# Altium PCB lab1_shkabara_usb_rs232.PcbDoc
Units mm, origin at the board's own origin, x right, y up, seen from the top; angles counter-clockwise.
Board outline 78 x 33.8 mm, 4 copper layers (Top Layer, Signal Layer 1, Signal Layer 2, Bottom Layer), stack 1.522 mm thick; 28 components, 25 nets, 125 pads, 38 vias.
Unrouted connection lines stored in the file: 11.
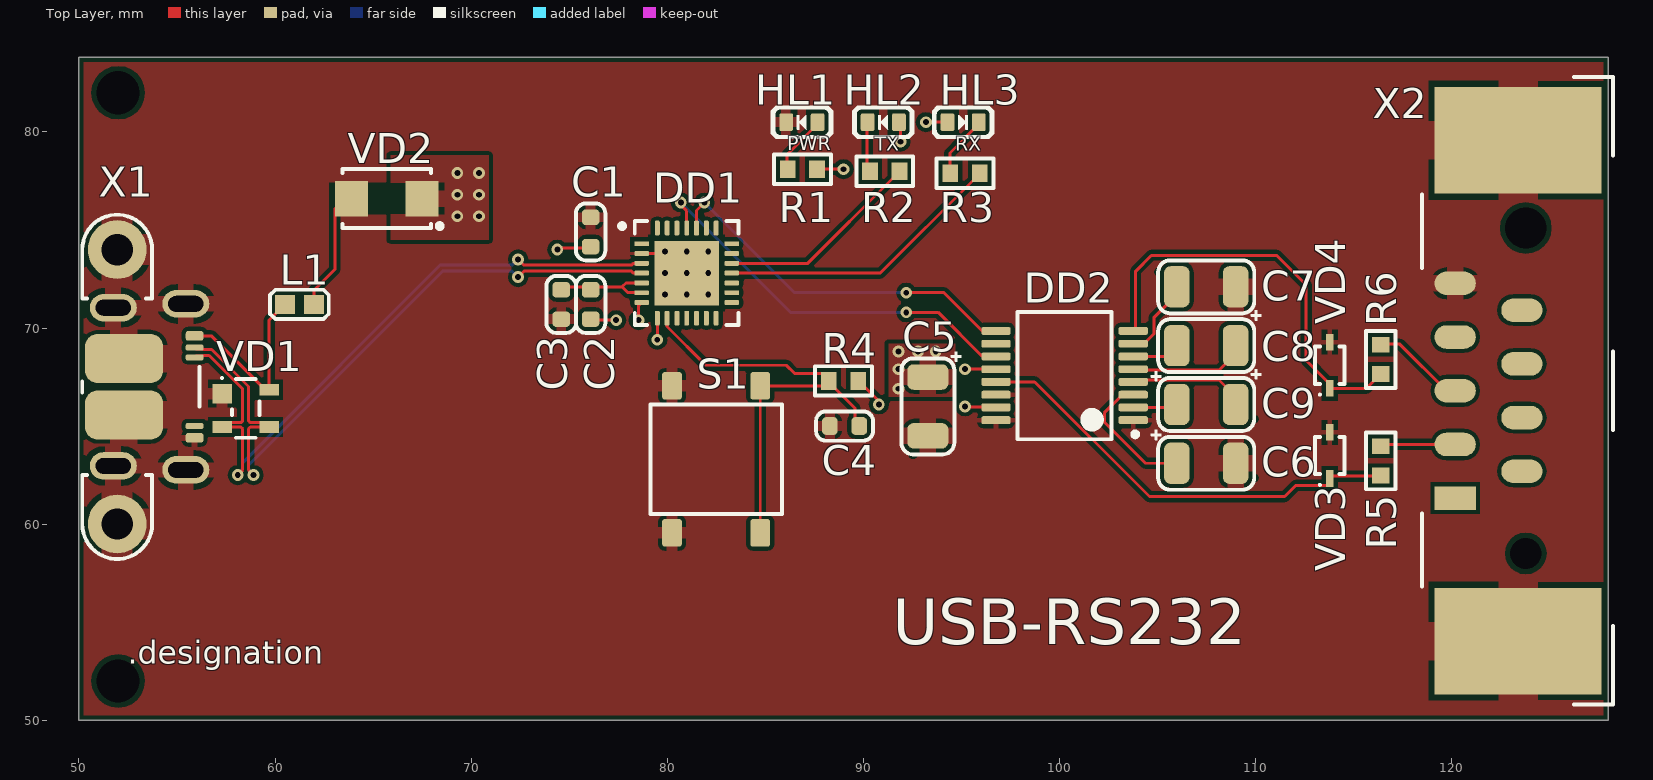
[diagram p0: Top Layer view]
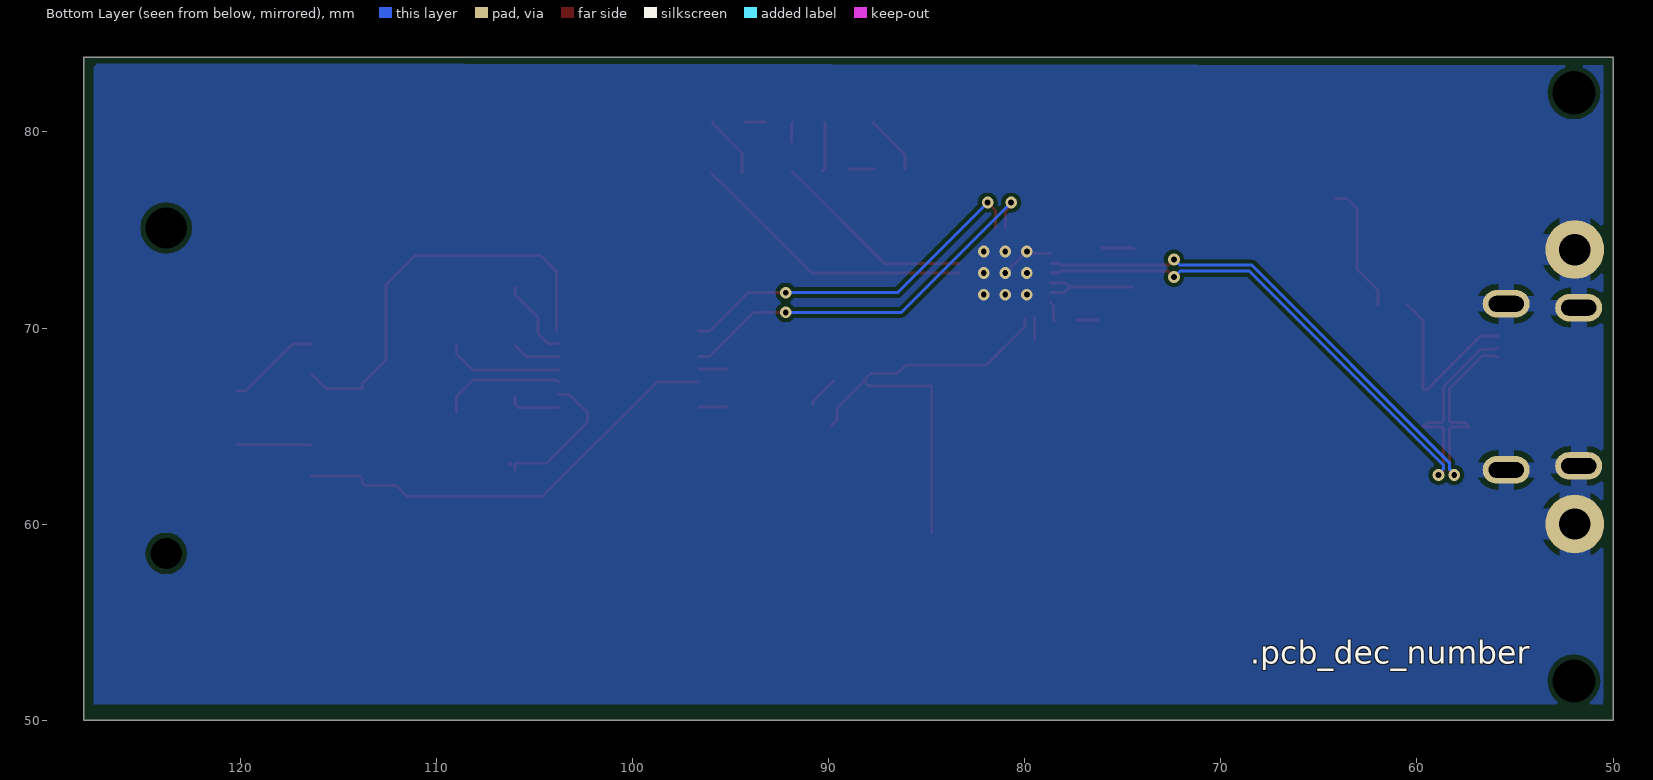
[diagram p1: Bottom Layer view, seen from below]
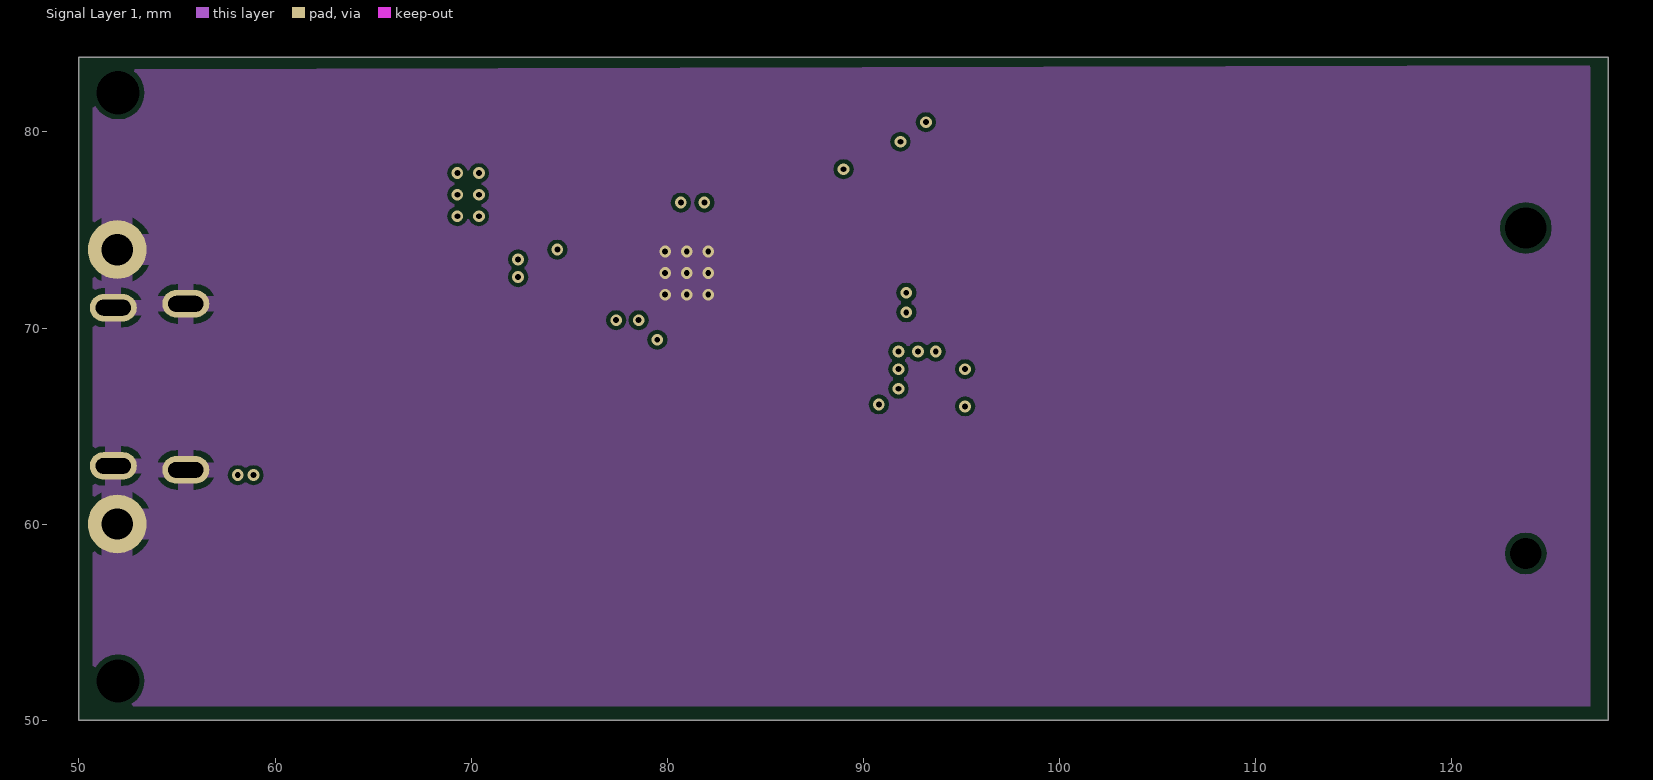
[diagram p2: Signal Layer 1]
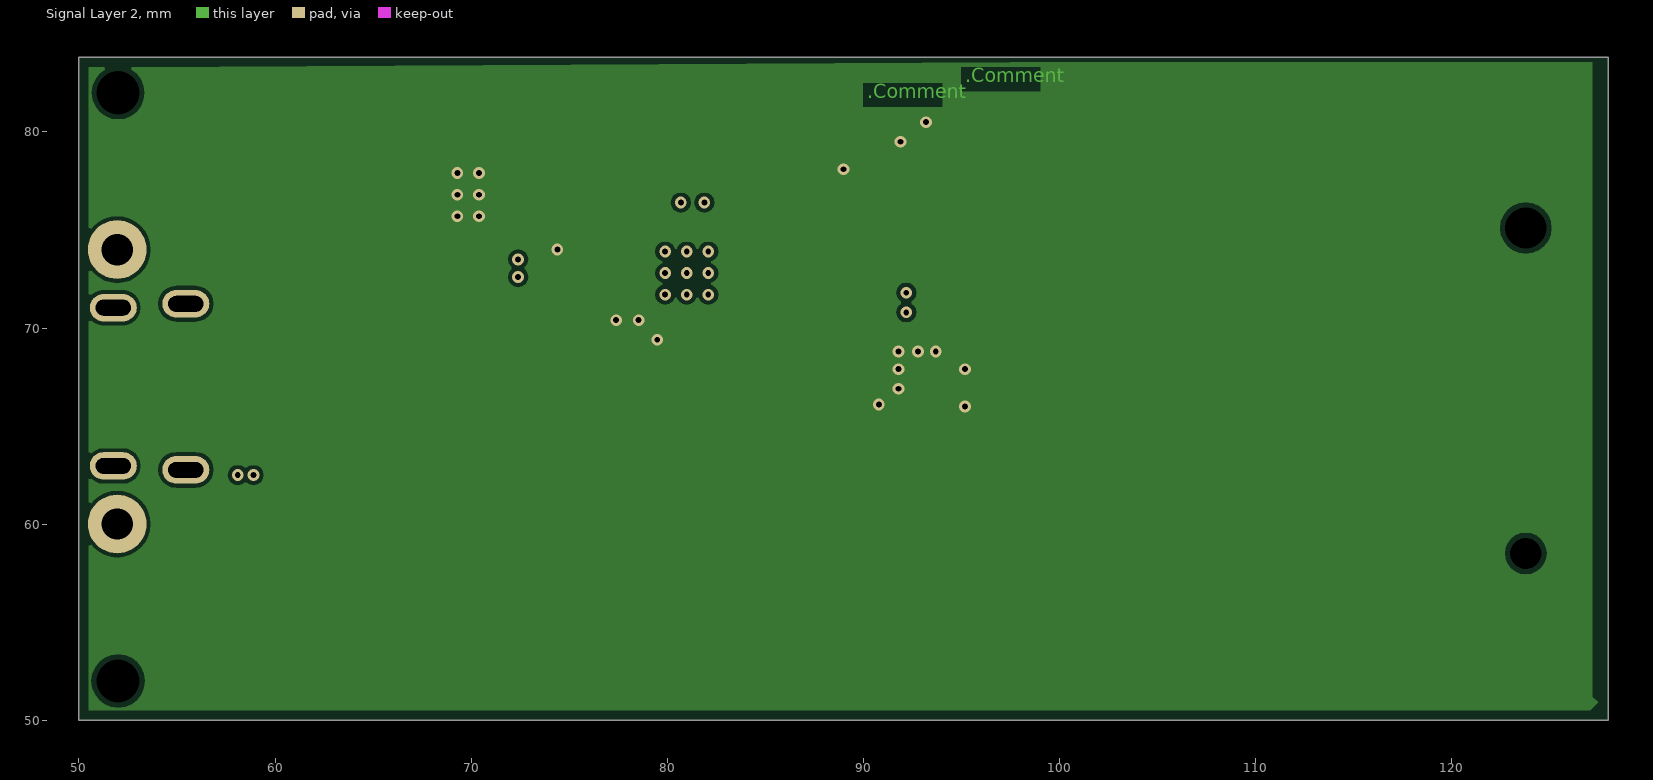
[diagram p3: Signal Layer 2]
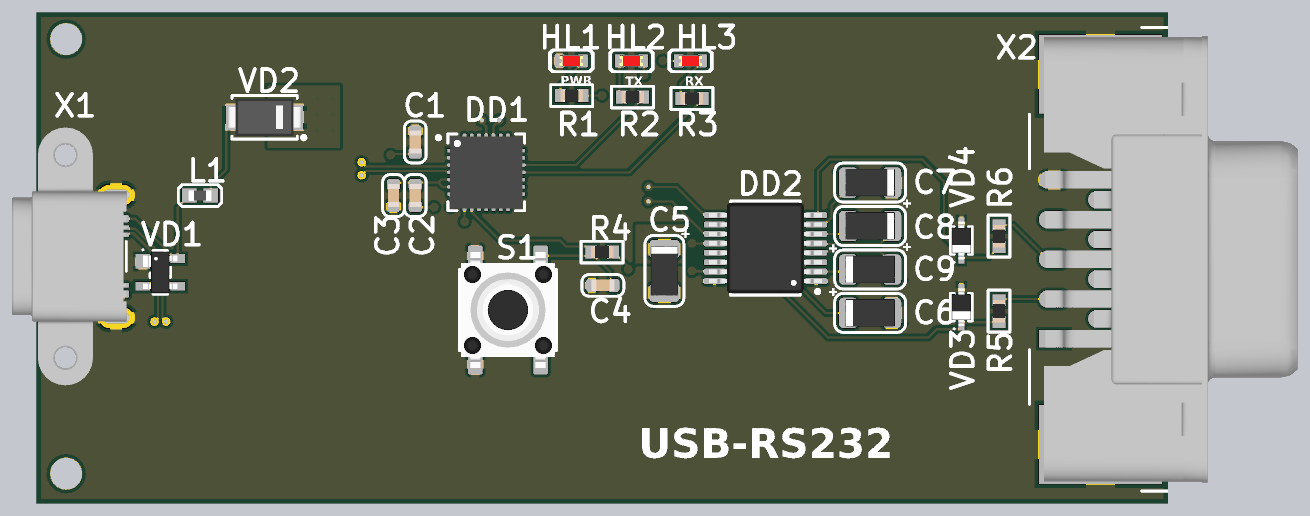
[diagram p4: 3D render of the assembled board from above, using the file's embedded part models]

## Layer stack, top to bottom
Top Solder: solder mask 0.0102, Solder Resist, Dk 3.5
Top Layer: signal copper 0.018
Prepreg 1: prepreg 0.125, FR4 HiTg170, Dk 5.07
Signal Layer 1: signal copper 0.018
Core 1: core 1.2, FR4, Dk 4.6
Signal Layer 2: signal copper 0.018
Prepreg 2: prepreg 0.125, FR4 HiTg170, Dk 5.07
Bottom Layer: signal copper 0.018
Bottom Solder: solder mask 0.0102, Solder Resist, Dk 3.5

## Board outline
50,50 128,50 128,83.8 50,83.8

## Design rules (kind name [scope] priority, off if disabled: settings)
AcuteAngle min_acute_angle [OnCopper] p1: minimum=3.50000000000000E+0001 checktracksonly=FALSE // Минимальный угол между примитивами топологии
BoardOutlineClearance board_outline_clearance_std [NOT (OnLayer('Bottom Overlay') OR OnLayer('Top Overlay'))] p1: gap=0.25 ignorepadtopadclearanceinfootprint=FALSE except(0: Arc-SplitContinuation Track-SplitContinuation SMDPad-SplitContinuation THPad-SplitContinuation Via-SplitContinuation Fill-SplitContinuation Poly-SplitContinuation Region-SplitContinuation Text-SplitContinuation) // Отступ элементов топологии от края фрезеруемой печатной платы
Clearance "Stitching GND" [IsStitchingVia and InNet('GND') vs (IsVia and (Not IsStitchingVia)) Or IsPad] p1: gap=0.127 ignorepadtopadclearanceinfootprint=FALSE
Clearance clearance_outer_18um_std [OnTopLayer OR OnBottomLayer] p2: gap=0.125 ignorepadtopadclearanceinfootprint=TRUE except(0.2: Arc-Fill Arc-Poly Track-Fill Track-Poly SMDPad-SMDPad SMDPad-Fill SMDPad-Poly THPad-Fill THPad-Poly Via-Fill Via-Poly Fill-Fill Fill-Poly Poly-Poly Poly-Region Poly-Text; 0.25: Arc-Hole Track-Hole SMDPad-Hole THPad-Hole Via-Hole Fill-Hole Poly-Hole Region-Hole Text-Hole) // Зазоры на внешних слоях
Clearance clearance_inner_18um_std [NOT (OnTopLayer Or OnBottomLayer)] p3: gap=0.125 ignorepadtopadclearanceinfootprint=FALSE except(0.2: Arc-Fill Arc-Poly Track-Fill Track-Poly SMDPad-SMDPad SMDPad-Fill SMDPad-Poly THPad-Fill THPad-Poly Via-Fill Via-Poly Fill-Fill Fill-Poly Poly-Poly Poly-Region Poly-Text; 0.25: Arc-Hole Track-Hole SMDPad-Hole THPad-Hole Via-Hole Fill-Hole Poly-Hole Region-Hole Text-Hole) // Зазоры на внутренних слоях
ComponentClearance [All] p1: gap=0 collisioncheckmode=3 verticalgap=0 showdistances=FALSE
DiffPairsRouting "Schematic Differential Pairs Routing_1" [InNet('USB_D_P')] p1: maxlimit=0.254 minlimit=0.15 mostfreqgap=0.254 toplayer_maxgap=0.15 toplayer_prefgap=0.15 toplayer_minwidth=0.155 toplayer_maxwidth=0.155 toplayer_prefwidth=0.155 bottomlayer_maxgap=0.15 bottomlayer_prefgap=0.15 bottomlayer_minwidth=0.155 bottomlayer_maxwidth=0.155 bottomlayer_prefwidth=0.155 impedanceprofiledriven=TRUE impedanceprofileid={1B1F1868-2FFB-4D51-908A-913D90CA9AFC} impedanceprofilevalue=95.000000 maxuncoupledlength=12.7
DiffPairsRouting "Schematic Differential Pairs Routing" [InNet('USB_D_N')] p2: maxlimit=0.254 minlimit=0.15 mostfreqgap=0.254 toplayer_maxgap=0.15 toplayer_prefgap=0.15 toplayer_minwidth=0.155 toplayer_maxwidth=0.155 toplayer_prefwidth=0.155 bottomlayer_maxgap=0.15 bottomlayer_prefgap=0.15 bottomlayer_minwidth=0.155 bottomlayer_maxwidth=0.155 bottomlayer_prefwidth=0.155 impedanceprofiledriven=TRUE impedanceprofileid={1B1F1868-2FFB-4D51-908A-913D90CA9AFC} impedanceprofilevalue=95.000000 maxuncoupledlength=12.7
DiffPairsRouting diff_pairs_routing [All] p3: maxlimit=0.254 minlimit=0.127 mostfreqgap=0.254 toplayer_maxgap=0.127 toplayer_prefgap=0.127 toplayer_minwidth=0.143 toplayer_maxwidth=0.143 toplayer_prefwidth=0.143 midlayer1_minwidth=0.381 midlayer1_maxwidth=0.381 midlayer1_prefwidth=0.381 midlayer2_minwidth=0.381 midlayer2_maxwidth=0.381 midlayer2_prefwidth=0.381 bottomlayer_maxgap=0.127 bottomlayer_prefgap=0.127 bottomlayer_minwidth=0.143 bottomlayer_maxwidth=0.143 bottomlayer_prefwidth=0.143 impedanceprofiledriven=TRUE maxuncoupledlength=12.7 // Правила трассировки дифференциальных пар
HoleSize min_hole_size_std [IsPad] p1: absolutevalues=TRUE maxlimit=5.9 minlimit=0.6 maxpercent=80.000 minpercent=20.000 // Диаметр межслойного переходного отверстия
HoleSize min_hole_size_via_std [IsVia] p2: absolutevalues=TRUE maxlimit=5.9 minlimit=0.3 maxpercent=80.000 minpercent=20.000 // Минимальный диаметр монтажного отверстия
HoleToHoleClearance hole_to_hole_clearance_std [All] p1: gap=0.2 allowstackedmicrovias=FALSE // Минимальное расстояние между краями двух отверстий
MinimumAnnularRing min_via_ar_std [All] p1: minimumring=0.15 // Поясок площадки переходного отверстия (Annular ring VIA)
MinimumAnnularRing min_pad_ar_std [All] p2: minimumring=0.2 // Поясок монтажной контактной площадки (Annular ring PAD)
MinimumSolderMaskSliver min_solder_mask_bridge_std [All] p1: minsoldermaskwidth=0.15 // Мнимальная ширина масочного мостика
PlaneClearance plane_clearance_18um_std [All] p1: clearance=0.2 // Отступ полигона (для слоя plane) от элементов топологии
PlaneConnect [All] p1: planeconnectstyle=Relief reliefexpansion=0.5 reliefentries=4 reliefconductorwidth=0.2 reliefairgap=0.2
PolygonConnect poly_connect_to_pad<=0.3 [(AsMM(PadXSize_AllLayers)<=0.301) or (AsMM(PadYSize_AllLayers)<=0.301)] p1: thpad.connectstyle=Relief thpad.reliefconductorwidth=0.2 thpad.reliefentries=4 thpad.polygonreliefangle="90 Angle" thpad.airgapwidth=0.2 smdpad.connectstyle=Relief smdpad.reliefconductorwidth=0.2 smdpad.reliefentries=4 smdpad.polygonreliefangle="90 Angle" smdpad.airgapwidth=0.2 via.connectstyle=Direct via.reliefconductorwidth=0.254 via.reliefentries=4 via.polygonreliefangle="90 Angle" via.airgapwidth=0.254 // Правила подключения полигонов для падов от 0,3мм и меньше
PolygonConnect poly_connect_to_pad<=0.4 [(AsMM(PadXSize_AllLayers)<=0.401) or (AsMM(PadYSize_AllLayers)<=0.401)] p2: thpad.connectstyle=Relief thpad.reliefconductorwidth=0.26 thpad.reliefentries=4 thpad.polygonreliefangle="90 Angle" thpad.airgapwidth=0.2 smdpad.connectstyle=Relief smdpad.reliefconductorwidth=0.26 smdpad.reliefentries=4 smdpad.polygonreliefangle="90 Angle" smdpad.airgapwidth=0.2 via.connectstyle=Direct via.reliefconductorwidth=0.254 via.reliefentries=4 via.polygonreliefangle="90 Angle" via.airgapwidth=0.254 // Правила подключения полигонов для падов от 0,4 и меньше
PolygonConnect poly_connect_to_pad<=0.6 [(AsMM(PadXSize_AllLayers)<=0.601) or (AsMM(PadYSize_AllLayers)<=0.601)] p3: thpad.connectstyle=Relief thpad.reliefconductorwidth=0.33 thpad.reliefentries=4 thpad.polygonreliefangle="90 Angle" thpad.airgapwidth=0.2 smdpad.connectstyle=Relief smdpad.reliefconductorwidth=0.33 smdpad.reliefentries=4 smdpad.polygonreliefangle="90 Angle" smdpad.airgapwidth=0.2 via.connectstyle=Direct via.reliefconductorwidth=0.254 via.reliefentries=4 via.polygonreliefangle="90 Angle" via.airgapwidth=0.254 // Правила подключения полигонов для падов от 0,6мм и меньше
PolygonConnect poly_connect_to_pad<=0.7 [(AsMM(PadXSize_AllLayers)<=0.701) or (AsMM(PadYSize_AllLayers)<=0.701)] p4: thpad.connectstyle=Relief thpad.reliefconductorwidth=0.46 thpad.reliefentries=4 thpad.polygonreliefangle="90 Angle" thpad.airgapwidth=0.2 smdpad.connectstyle=Relief smdpad.reliefconductorwidth=0.46 smdpad.reliefentries=4 smdpad.polygonreliefangle="90 Angle" smdpad.airgapwidth=0.2 via.connectstyle=Direct via.reliefconductorwidth=0.254 via.reliefentries=4 via.polygonreliefangle="90 Angle" via.airgapwidth=0.254 // Правила подключения полигонов для падов от 0,7мм и меньше
PolygonConnect poly_connect_to_pad<=0.8 [(AsMM(PadXSize_AllLayers)<=0.8)or(AsMM(PadYSize_AllLayers)<=0.8)] p5: thpad.connectstyle=Relief thpad.reliefconductorwidth=0.53 thpad.reliefentries=4 thpad.polygonreliefangle="90 Angle" thpad.airgapwidth=0.3 smdpad.connectstyle=Relief smdpad.reliefconductorwidth=0.53 smdpad.reliefentries=4 smdpad.polygonreliefangle="90 Angle" smdpad.airgapwidth=0.2 via.connectstyle=Direct via.reliefconductorwidth=0.254 via.reliefentries=4 via.polygonreliefangle="90 Angle" via.airgapwidth=0.254 // Правила подключения полигонов для падов от 0,8мм и меньше
PolygonConnect poly_connect_to_pad<=1 [(AsMM(PadXSize_AllLayers)<=1.01)or(AsMM(PadYSize_AllLayers)<=1.01)] p6: thpad.connectstyle=Relief thpad.reliefconductorwidth=0.6 thpad.reliefentries=4 thpad.polygonreliefangle="90 Angle" thpad.airgapwidth=0.3 smdpad.connectstyle=Relief smdpad.reliefconductorwidth=0.6 smdpad.reliefentries=4 smdpad.polygonreliefangle="90 Angle" smdpad.airgapwidth=0.2 via.connectstyle=Direct via.reliefconductorwidth=0.254 via.reliefentries=4 via.polygonreliefangle="90 Angle" via.airgapwidth=0.254 // Правила подключения полигонов для падов от 1мм и меньше
PolygonConnect poly_connect_to_pad<=1.3 [(AsMM(PadXSize_AllLayers)<=1.31)or(AsMM(PadYSize_AllLayers)<=1.31)] p7: thpad.connectstyle=Relief thpad.reliefconductorwidth=0.66 thpad.reliefentries=4 thpad.polygonreliefangle="90 Angle" thpad.airgapwidth=0.3 smdpad.connectstyle=Relief smdpad.reliefconductorwidth=0.86 smdpad.reliefentries=4 smdpad.polygonreliefangle="90 Angle" smdpad.airgapwidth=0.2 via.connectstyle=Direct via.reliefconductorwidth=0.254 via.reliefentries=4 via.polygonreliefangle="90 Angle" via.airgapwidth=0.254 // Правила подключения полигонов для падов от 1,3мм и меньше
PolygonConnect poly_connect_to_pad<=1.6 [(AsMM(PadXSize_AllLayers)<=1.61)or(AsMM(PadYSize_AllLayers)<=1.61)] p8: thpad.connectstyle=Relief thpad.reliefconductorwidth=0.8 thpad.reliefentries=4 thpad.polygonreliefangle="90 Angle" thpad.airgapwidth=0.3 smdpad.connectstyle=Relief smdpad.reliefconductorwidth=1 smdpad.reliefentries=4 smdpad.polygonreliefangle="90 Angle" smdpad.airgapwidth=0.2 via.connectstyle=Direct via.reliefconductorwidth=0.254 via.reliefentries=4 via.polygonreliefangle="90 Angle" via.airgapwidth=0.254 // Правила подключения полигонов для падов от 1,6мм и меньше
PolygonConnect poly_connect_to_pad<=1.8 [(AsMM(PadXSize_AllLayers)<=1.8)or(AsMM(PadYSize_AllLayers)<=1.8)] p9: thpad.connectstyle=Relief thpad.reliefconductorwidth=1 thpad.reliefentries=4 thpad.polygonreliefangle="90 Angle" thpad.airgapwidth=0.3 smdpad.connectstyle=Relief smdpad.reliefconductorwidth=1.2 smdpad.reliefentries=4 smdpad.polygonreliefangle="90 Angle" smdpad.airgapwidth=0.2 via.connectstyle=Direct via.reliefconductorwidth=0.254 via.reliefentries=4 via.polygonreliefangle="90 Angle" via.airgapwidth=0.254 // Правила подключения полигонов для падов от 1,8мм и меньше
PolygonConnect poly_connect_to_pad<=2 [(AsMM(PadXSize_AllLayers)<=2.01)or(AsMM(PadYSize_AllLayers)<=2.01)] p10: thpad.connectstyle=Relief thpad.reliefconductorwidth=1.1 thpad.reliefentries=4 thpad.polygonreliefangle="90 Angle" thpad.airgapwidth=0.3 smdpad.connectstyle=Relief smdpad.reliefconductorwidth=1.4 smdpad.reliefentries=4 smdpad.polygonreliefangle="90 Angle" smdpad.airgapwidth=0.2 via.connectstyle=Direct via.reliefconductorwidth=0.254 via.reliefentries=4 via.polygonreliefangle="90 Angle" via.airgapwidth=0.254 // Правила подключения полигонов для падов от 2мм и меньше
PolygonConnect poly_connect_to_pad<=2.3 [(AsMM(PadXSize_AllLayers)<=2.31)or(AsMM(PadYSize_AllLayers)<=2.31)] p11: thpad.connectstyle=Relief thpad.reliefconductorwidth=1.2 thpad.reliefentries=4 thpad.polygonreliefangle="90 Angle" thpad.airgapwidth=0.3 smdpad.connectstyle=Relief smdpad.reliefconductorwidth=1.4 smdpad.reliefentries=4 smdpad.polygonreliefangle="90 Angle" smdpad.airgapwidth=0.2 via.connectstyle=Direct via.reliefconductorwidth=0.254 via.reliefentries=4 via.polygonreliefangle="90 Angle" via.airgapwidth=0.254 // Правила подключения полигонов для падов от 2,3мм и меньше
PolygonConnect poly_connect_to_pad<=2.5 [(AsMM(PadXSize_AllLayers)<=2.51)or(AsMM(PadYSize_AllLayers)<=2.51)] p12: thpad.connectstyle=Relief thpad.reliefconductorwidth=1.2 thpad.reliefentries=4 thpad.polygonreliefangle="90 Angle" thpad.airgapwidth=0.3 smdpad.connectstyle=Relief smdpad.reliefconductorwidth=1.4 smdpad.reliefentries=4 smdpad.polygonreliefangle="90 Angle" smdpad.airgapwidth=0.2 via.connectstyle=Direct via.reliefconductorwidth=0.254 via.reliefentries=4 via.polygonreliefangle="90 Angle" via.airgapwidth=0.254 // Правила подключения полигонов для падов от 2,5мм и меньше
PolygonConnect poly_connect_to_pad<=2.7 [(AsMM(PadXSize_AllLayers)<=2.71)or(AsMM(PadYSize_AllLayers)<=2.71)] p13: thpad.connectstyle=Relief thpad.reliefconductorwidth=1.4 thpad.reliefentries=4 thpad.polygonreliefangle="90 Angle" thpad.airgapwidth=0.3 smdpad.connectstyle=Relief smdpad.reliefconductorwidth=1.6 smdpad.reliefentries=4 smdpad.polygonreliefangle="90 Angle" smdpad.airgapwidth=0.2 via.connectstyle=Direct via.reliefconductorwidth=0.254 via.reliefentries=4 via.polygonreliefangle="90 Angle" via.airgapwidth=0.254 // Правила подключения полигонов для падов от 2,7мм и меньше
PolygonConnect poly_connect_to_pad<=3 [(AsMM(PadXSize_AllLayers)<=3.01)or(AsMM(PadYSize_AllLayers)<=3.01)] p14: thpad.connectstyle=Relief thpad.reliefconductorwidth=1.6 thpad.reliefentries=4 thpad.polygonreliefangle="90 Angle" thpad.airgapwidth=0.3 smdpad.connectstyle=Relief smdpad.reliefconductorwidth=1.8 smdpad.reliefentries=4 smdpad.polygonreliefangle="90 Angle" smdpad.airgapwidth=0.2 via.connectstyle=Direct via.reliefconductorwidth=0.254 via.reliefentries=4 via.polygonreliefangle="90 Angle" via.airgapwidth=0.254 // Правила подключения полигонов для падов от 3мм и меньше
PolygonConnect poly_connect_to_pad<=7 [(AsMM(PadXSize_AllLayers)<7.01)or(AsMM(PadYSize_AllLayers)<=7.01)] p15: thpad.connectstyle=Relief thpad.reliefconductorwidth=2 thpad.reliefentries=4 thpad.polygonreliefangle="90 Angle" thpad.airgapwidth=0.4 smdpad.connectstyle=Relief smdpad.reliefconductorwidth=2 smdpad.reliefentries=4 smdpad.polygonreliefangle="90 Angle" smdpad.airgapwidth=0.3 via.connectstyle=Direct via.reliefconductorwidth=0.254 via.reliefentries=4 via.polygonreliefangle="90 Angle" via.airgapwidth=0.254 // Правила подключения полигонов для падов от 7мм и меньше
PolygonConnect poly_connect_to_pad [All] p16: thpad.connectstyle=Relief thpad.reliefconductorwidth=0.25 thpad.reliefentries=4 thpad.polygonreliefangle="90 Angle" thpad.airgapwidth=0.2 smdpad.connectstyle=Relief smdpad.reliefconductorwidth=0.25 smdpad.reliefentries=4 smdpad.polygonreliefangle="90 Angle" smdpad.airgapwidth=0.2 via.connectstyle=Direct via.reliefconductorwidth=0.25 via.reliefentries=4 via.polygonreliefangle="90 Angle" via.airgapwidth=0.2 // Правила подключения полигонов общие
RoutingCorners [All] p1 off: cornerstyle=45-Degree minsetback=2.5 maxsetback=2.5
RoutingVias [All] p1: holewidth=0.3 width=0.6 viastyle="Through Hole" minholewidth=0.3 minwidth=0.6 maxholewidth=0.3 maxwidth=0.6 useviatemplates=TRUE viatemplateguid#1={E0663DAF-19B7-47A2-8066-6F8555930082} viatemplatename#1=v50h20
SilkToSilkClearance silk_to_silk_clearance_std [All] p1 off: silktosilkclearance=0.15 // Отступ текста шелкографии от других примитивов шелкографии
SilkToSolderMaskClearance silk_to_solder_mask_clearance_std [IsPad] p1 off: minsilkscreentomaskgap=0.15 clearancetoexposedcopper=FALSE // Минимальное расстояние между элементами шелкографии и вскрытой медью
SolderMaskExpansion solder_mask_expansion_std [All] p1: expansion=0.05 // Припуск паяльной масски
UnRoutedNet [All] p1: checkbadconnections=TRUE
Width width_18um_std [All] p1: maxlimit=10 minlimit=0.125 preferedwidth=0.15 checkconnectedcopper=TRUE // Ширина проводников (общая)
19 further rules are at their usual default settings.

## Classes and differential pairs
differential pair class USB_SIGNALS: USB_D
differential pair USB_D: +USB_D_P -USB_D_N

## Components (designator, comment, footprint, x,y, rotation, side; value= is the part's Value field where it differs from the comment)
C1 "1 мк" C0603 76.1,74.9 r90 top
C2 "1 мк" C0603 76.1,71.2 r90 top
C3 "0,1 мк" C0603 74.6,71.2 r270 top
C4 "0,1 мк" C0603 89.05,65 r0 top
C5 "0,1 мк" C3216-18 93.3,66 r270 top
C6 "0,33 мк" C3216-18 107.5,63.1 r0 top
C7 "0,33 мк" C3216-18 107.5,72.1 r180 top
C8 "0,33 мк" C3216-18 107.5,69.1 r180 top
C9 "0,1 мк" C3216-18 107.5,66.1 r0 top
DD1 "CP2103-GM" QFN-28-500X500X90 81,72.8 r0 top
DD2 "MAX3221ECDB" SSOP-16-620X530X195 100.275,67.575 r180 top
HL1 "TLMY1000-GS08" HL0603 86.875,80.5 r0 top
HL2 "TLMS1000-GS08" HL0603 91.025,80.5 r0 top
HL3 "TLMG1100-GS08" HL0603 95.1,80.5 r180 top
L1 "BLM18KG221SH1D" BLM-2-0603 61.24,71.2 r0 top
R1 "220" R0603 86.9,78.1 r0 top
R2 "220" R0603 91.1,78 r0 top
R3 "220" R0603 95.2,77.9 r0 top
R4 "10 к" R0603 89,67.3 r0 top
R5 "22" R0603 116.4,63.225 r90 top
R6 "22" R0603 116.4,68.4 r90 top
S1 "KLS7-TS6604-5.0-180-B" KLS7-TS6604-5.0-180-B 82.5,63.3 r90 top
VD1 "SP0503BAHTG" SOT-143-4 58.5,65.9 r0 top
VD2 "SL13-E3/5AT" DO-214AC 65.7,76.6 r180 top
VD3 "SD12C-01FTG" SOD-323 113.8,63.5 r90 top
VD4 "SD12C-01FTG" SOD-323 113.8,68.1 r90 top
X1 "2108877-1" 2108877-1 52.2,67 r90 top
X2 "1-1740194-2" 1-1740194-2 128,66.8 r270 top

## Footprints (in the part's own frame and the unit in brackets; to place one, negate y for a bottom-side part, rotate by r counter-clockwise, add the part's x,y. Pads: shape width x height; smd on the part's side, far side on the other; paste and mask are expansions set on the pad)
1-1740194-2 [mm]
  rect 1.2x2.1 smd: 1(5.48,-7.8)
  oval 1.2x2.1 smd: 2(2.74,-7.8) 3(0,-7.8) 4(-2.74,-7.8) 5(-5.48,-7.8) 6(4.11,-4.4) 7(1.37,-4.4) 8(-1.37,-4.4) 9(-4.11,-4.4)
  rect 5.45x8.5 smd: TP1(-12.775,-4.6) TP1(12.775,-4.6)
  round 0 hole 2.1: ""(-8.3,-4.2)
  round 0 hole 1.6: ""(8.3,-4.2)
  silkscreen extent -16,-9.5 16,0.25, body extent -15.4,-8.5 15.4,9, height 9.87
2108877-1 [mm] "Micro USB-B, Flanged"
  rrect50% 0.5x0.9 smd: 1(2.6,-3.696) 5(-2.6,-3.696)
  rrect50% 0.3x0.9 smd: 2(2,-3.696) 3(1.5,-3.696) 4(-2,-3.696)
  round 3 hole 1.6: TP1(-7,0.25) TP2(7,0.25)
  oval 1.4x2.4 hole 0.8 slot 1.8 at 90 deg mask+0.102: TP1(-4.235,-3.25) TP1(-4.035,0.45) TP2(4.035,0.45) TP2(4.235,-3.25)
  rrect50% 2.5x3.98 smd: TP1(-1.441,-0.104) TP2(1.441,-0.104)
  silkscreen extent -8.78,-3.95 8.78,2.03, body extent -8.9,-3.95 8.9,3.95, height 3.39
BLM-2-0603 [mm] "Chip Inductor, 2-Leads, Body 1,60x0,80mm, IPC Medium Density"
  rect 1.02x0.98 smd: 1(-0.74,0) 2(0.74,0)
  silkscreen extent -1.5,-0.75 1.5,0.75, body extent -0.8,-0.37 0.8,0.38, height 0.8
C0603 [mm] "Chip Capacitor, 2-Leads, Body 1,60x0,80mm, IPC Medium Density"
  rrect50% 0.8x0.9 smd: 1(-0.75,0) 2(0.75,0)
  silkscreen extent -1.45,-0.75 1.45,0.75, body extent -0.8,-0.4 0.8,0.4, height 0.8
C3216-18 [mm] "Chip Tantalum Capacitor, 2-Leads, Body 3,20x1,60mm, IPC Medium Density"
  rrect50% 1.3x2.1 smd: 1(-1.5,0) 2(1.5,0)
  Top Layer lines w0.05: 2.45,-0.75 2.425,-0.75
  silkscreen extent -2.8,-1.35 2.45,1.7, body extent -1.7,-0.95 1.7,0.95, height 1.83
DO-214AC [mm] "Molded Diode, 2-Leads, Body 4,25x2,67mm, IPC Medium Density"
  rect 1.7x1.8 smd: 1(-1.8,0) 2(1.8,0)
  silkscreen extent -2.83,-1.5 2.25,1.52, body extent -2.55,-1.3 2.55,1.3, height 2.26
HL0603 [mm] "Chip Resistor, 2-Leads, Body 1,60x0,80mm, IPC Medium Density"
  rrect25% 0.7x0.9 smd: 1(-0.8,0) 2(0.8,0)
  silkscreen extent -1.5,-0.75 1.5,0.75, body extent -0.81,-0.4 0.81,0.4, height 0.64
KLS7-TS6604-5.0-180-B [mm]
  rrect25% 1.4x1 smd: 1(-3.75,2.25) 1(3.75,2.25) 2(-3.75,-2.25) 2(3.75,-2.25)
  silkscreen extent -2.79,-3.35 2.79,3.35, body extent -4,-3.25 4,3.25, height 4.3
QFN-28-500X500X90 [mm] "QFN, 28-Leads, Body 5,00x5,00mm, Pitch 0,50mm, Thermal Pad 3,20x3,20mm, IPC Medium Density"
  rect 3.3x3.3 smd: 0(0,0)
  rect 0.75x0.25 smd: 1(-2.3,1.5)
  rrect50% 0.75x0.25 smd: 2(-2.3,1) 3(-2.3,0.5) 4(-2.3,0) 5(-2.3,-0.5) 6(-2.3,-1) 7(-2.3,-1.5) 15(2.3,-1.5) 16(2.3,-1) 17(2.3,-0.5) 18(2.3,0) 19(2.3,0.5) 20(2.3,1) 21(2.3,1.5)
  rrect50% 0.25x0.75 smd: 8(-1.5,-2.3) 9(-1,-2.3) 10(-0.5,-2.3) 11(0,-2.3) 12(0.5,-2.3) 13(1,-2.3) 14(1.5,-2.3) 22(1.5,2.3) 23(1,2.3) 24(0.5,2.3) 25(0,2.3) 26(-0.5,2.3) 27(-1,2.3) 28(-1.5,2.3)
  silkscreen extent -3.42,-2.65 2.65,2.65, body extent -2.5,-2.5 2.5,2.5, height 0.9
R0603 [mm] "Chip Resistor, 2-Leads, Body 1,60x0,80mm, IPC Medium Density"
  rect 0.8x0.9 smd: 1(-0.75,0) 2(0.75,0)
  silkscreen extent -1.45,-0.75 1.45,0.75, body extent -0.77,-0.43 0.78,0.43, height 0.43
SOD-323 [mm] "SODFL, 2-Leads, Body 1,30x2,57mm, IPC Medium Density"
  rect 0.85x0.4 smd: 1(-1.175,0) 2(1.175,0)
  silkscreen extent -1.55,-0.75 0.95,0.75, body extent -1.3,-0.67 1.3,0.68, height 1.1
SOT-143-4 [mm] "SOT143, 4-Leads, Body 2,92x2,37mm, Pitch 1,90mm, IPC Medium Density"
  rect 1x1 smd: 1(-1.2,0.75)
  rect 1x0.6 smd: 2(-1.2,-0.95) 3(1.2,-0.95) 4(1.2,0.95)
  silkscreen extent -1.25,-1.5 0.7,1.6, body extent -1.18,-1.45 1.18,1.45, height 1.22
SSOP-16-620X530X195 [mm] "SOP, 16-Leads, Body 6,20x5,30mm, Pitch 0,65mm, IPC Medium Density"
  rrect50% 1.5x0.4 smd: 1(-3.5,2.275) 2(-3.5,1.625) 3(-3.5,0.975) 4(-3.5,0.325) 5(-3.5,-0.325) 6(-3.5,-0.975) 7(-3.5,-1.625) 8(-3.5,-2.275) 9(3.5,-2.275) 10(3.5,-1.625) 11(3.5,-0.975) 12(3.5,-0.325) 13(3.5,0.325) 14(3.5,0.975) 15(3.5,1.625) 16(3.5,2.275)
  silkscreen extent -3.73,-3.25 2.4,3.25, body extent -3.9,-3.1 3.9,3.1, height 2

## Part data
C1 C2: library part c0090, "=Описание", HelpURL=https://www.yageo.com/upload/media/product/productsearch/datasheet/mlcc/UPY-GPHC_X7R_6.3V-to-50V_20.pdf, ID=c0090, Корпус=0603, Наименование=CC0603KRX7R8BB105, Напряжение="25 В", Номинал="1 мк", Номинальное напряжение="25 В", Описание="Конденсатор керамический чип 0603 1 мкФ 25 В ±10 %", Отклонение="±10 %", Производитель="YAGEO Corp.", Рабочие температуры="от –55 °С до +125 °С", Температурный коэффициент емкости=X7R, Фамилия=Ларионов
C3 C4: library part c0058, "=Описание", HelpURL=https://www.yageo.com/upload/media/product/productsearch/datasheet/mlcc/UPY-GPHC_X7R_6.3V-to-50V_20.pdf, ID=c0058, Корпус=0603, Наименование=CC0603KRX7R8BB104, Напряжение="25 В", Номинал="0,1 мк", Номинальное напряжение="25 В", Описание="Конденсатор керамический чип 0603 100 нФ 25 В ±10 %", Отклонение="±10 %", Производитель="YAGEO Corp.", Рабочие температуры="от –55 °С до +125 °С", Температурный коэффициент емкости=X7R, Фамилия=Паньков
C5 C9: library part c0001, "=Описание", HelpURL=https://www.vishay.com/capacitors/list/product-40002/, ID=c0001, Корпус=3216-18, Наименование=293D104X9050A2TE3, Напряжение="50 В", Номинал="0,1 мк", Номинальное напряжение="50 В", Описание="Конденсатор танталовый чип 3216-18 100 нФ 50 В ±10 %", Отклонение="±10 %", Производитель="Vishay Intertechnology, Inc.", Рабочие температуры="от –55 °С до +125 °С", Среднеквадратичный размах пульсации тока="0,06 А", Фамилия=Ларионов, Эквивалентное последовательное сопротивление="19,0 Ом"
C6 C7 C8: library part c0004, "=Описание", HelpURL=https://www.vishay.com/capacitors/list/product-40002/, ID=c0004, Корпус=3216-18, Наименование=293D334X9025A2TE3, Напряжение="25 В", Номинал="0,33 мк", Номинальное напряжение="25 В", Описание="Конденсатор танталовый чип 3216-18 330 нФ 25 В ±10 %", Отклонение="±10 %", Производитель="Vishay Intertechnology, Inc.", Рабочие температуры="от –55 °С до +125 °С", Среднеквадратичный размах пульсации тока="0,08 А", Фамилия=Паньков, Эквивалентное последовательное сопротивление="13,0 Ом"
DD1: library part dd0004, "=Описание", HelpURL=https://www.silabs.com/interface/usb-bridges/classic/device.cp2103, ID=dd0004, Корпус=QFN-28, Наименование=CP2103-GM, Описание="Преобразователь USB-UART", Производитель="Silicon Laboratories", Фамилия=Кондрашова
DD2: library part dd0019, "=Описание", HelpURL=https://www.ti.com/product/MAX3221E, ID=dd0019, Корпус=SSOP-16, Наименование=MAX3221ECDB, Описание="Приемопередатчик RS-232", Производитель="Texas Instruments", Фамилия=Шкабара
HL1: library part hl0003, "=Описание", HelpURL=https://www.vishay.com/leds/list/product-83172/, ID=hl0003, Корпус=0603, Наименование=TLMY1000-GS08, Номинальная длина волны="588 нм", Номинальная сила света="7,5 мкд", Номинальное падение напряжения="1,8 В", Номинальный прямой ток="15 мА", Описание="Светодиод чип 0603 желтый", Производитель="Vishay Intertechnology, Inc.", Рабочие температуры="от –40 °С до +100 °С", Рассеиваемая мощность="40 мВт", Фамилия=Ларионов, Цвет=Желтый
HL2: library part hl0001, "=Описание", HelpURL=https://www.vishay.com/leds/list/product-83172/, ID=hl0001, Корпус=0603, Наименование=TLMS1000-GS08, Номинальная длина волны="628 нм", Номинальная сила света="4 мкд", Номинальное падение напряжения="1,8 В", Номинальный прямой ток="15 мА", Описание="Светодиод чип 0603 красный", Производитель="Vishay Intertechnology, Inc.", Рабочие температуры="от –40 °С до +100 °С", Рассеиваемая мощность="40 мВт", Фамилия=Ларионов, Цвет=Красный
HL3: library part hl0005, "=Описание", HelpURL=https://www.vishay.com/leds/list/product-83173/, ID=hl0005, Корпус=0603, Наименование=TLMG1100-GS08, Номинальная длина волны="570 нм", Номинальная сила света="35 мкд", Номинальное падение напряжения="2,1 В", Номинальный прямой ток="30 мА", Описание="Светодиод чип 0603 зеленый", Производитель="Vishay Intertechnology, Inc.", Рабочие температуры="от –40 °С до +100 °С", Рассеиваемая мощность="90 мВт", Фамилия=Ларионов, Цвет=Зеленый
L1: library part l0001, "=Описание", HelpURL=https://www.murata.com/en-global/products/productdetail?partno=BLM18KG221SH1%23, ID=l0001, Корпус=0603, Наименование=BLM18KG221SH1D, Описание="Ферритовая бусина 220 Ом ±25 %", Отклонение, 100 МГц="±25 %", Производитель="Murata Manufacturing Co., Ltd.", Рабочие температуры="от –55 °С до +125 °С", Сопротивление, 100 МГц="220 Ом", Сопротивление при постоянном токе="0,05 Ом", Фамилия=Ларионов
R1 R2 R3: library part r0015, "=Описание", HelpURL=https://www.yageo.com/upload/media/product/productsearch/datasheet/rchip/PYu-RC_Group_51_RoHS_L_11.pdf, ID=r0015, Корпус=0603, Наименование=RC0603FR-07220RL, Номинал=220, Номинальное напряжение="75 В", Номинальный ток="1 А", Описание="Резистор чип 0603 220 Ом ±1 % 0,1 Вт", Отклонение="±1 %", Примечание="Ряд E24", Производитель="YAGEO Corp.", Рабочие температуры="от –55 °С до +155 °С", Фамилия=Ларионов
R4: library part r0060, "=Описание", HelpURL=https://www.yageo.com/upload/media/product/productsearch/datasheet/rchip/PYu-RC_Group_51_RoHS_L_11.pdf, ID=r0060, Корпус=0603, Наименование=RC0603FR-0710KL, Номинал="10 к", Номинальное напряжение="75 В", Номинальный ток="1 А", Описание="Резистор чип 0603 10 кОм ±1 % 0,1 Вт", Отклонение="±1 %", Примечание="Ряд E24", Производитель="YAGEO Corp.", Рабочие температуры="от –55 °С до +155 °С", Фамилия=Самарин
R5 R6: library part r0004, "=Описание", HelpURL=https://www.yageo.com/upload/media/product/productsearch/datasheet/rchip/PYu-RC_Group_51_RoHS_L_11.pdf, ID=r0004, Корпус=0603, Наименование=RC0603FR-0722RL, Номинал=22, Номинальное напряжение="75 В", Номинальный ток="1 А", Описание="Резистор чип 0603 22 Ом ±1 % 0,1 Вт", Отклонение="±1 %", Примечание="Ряд E24", Производитель="YAGEO Corp.", Рабочие температуры="от –55 °С до +155 °С", Фамилия=Ларионов
S1: library part s0002, "=Описание", HelpURL=http://www.klsele.com/products/Switches/Tact-Switches-Series/939.html, ID=s0002, Количество контактов=4, Корпус="6,00 x 6,00 x 5,00", Наименование=KLS7-TS6604-5.0-180-B, Описание="Тактовая кнопка поверхностного монтажа", Производитель="Ningbo KLS Electronic Co., Ltd.", Промывка=Запрещена, Рабочие температуры="от –20 °С до +70 °С", Сопротивление контакта="50 мОм", Ток нагрузки="50 мА @ 12 В", Фамилия=Паньков
VD1: library part vd0001, "=Описание", HelpURL=https://www.littelfuse.com/products/tvs-diode-arrays/general-purpose-esd-protection/sp050xba-lead-free-green.aspx, ID=vd0001, Корпус=SOT-143-4, Наименование=SP0503BAHTG, Описание="Диодная сборка для подавления помех, 5 В", Производитель="Littelfuse, Inc.", Фамилия=Ларионов
VD2 VD3 VD4: library part vd0003, "=Описание", ID=vd0003, Фамилия=Ларионов
  VD2: HelpURL=https://www.vishay.com/product?docid=88740, Корпус=DO-214AC, Максимальное обратное напряжение="30 В", Максимальное прямое напряжение="0,445 В", Максимальный прямой ток="1,5 А", Наименование=SL13-E3/5AT, Описание="Диод Шоттки 30 В 1,5 А", Производитель="Vishay Intertechnology, Inc.", Рабочие температуры="от –55 °С до +125 °С"
  VD3 VD4: HelpURL=https://www.littelfuse.com/products/tvs-diode-arrays/general-purpose-esd-protection/sdc/sd12c_01ftg.aspx, Корпус=SOD-323, Наименование=SD12C-01FTG, Описание="Двунаправленная диодная сборка для подавления помех, 12 В", Производитель="Littelfuse, Inc."
X1: library part 2108877-1_micro_usb-b, Contact_1=VBUS, Contact_2=D-, Contact_3=D+, Contact_4=ID, Contact_5=GND, Наименование=2108877-1
X2: "D-Sub 9 pin Board-to-Board", Contact_1=CD, Contact_2=RD, Contact_3=TD, Contact_4=DTR, Contact_5=GND, Contact_6=DSR, Contact_7=RTS, Contact_8=CTS, Contact_9=RI, HelpURL=https://www.te.com/global-en/product-1-1740194-2.html, ID=x0002, Наименование=1-1740194-2, Описание="D-Sub 9 pin Board-to-Board", Производитель="TE Connectivity", Фамилия=Ларионов

## Free pads (board coordinates)
  round 1.524 hole 2.2: 1(52,82) 2(52,52)

## Via types
v1: diameter 0.6, hole 0.3, Top Layer to Signal Layer 2, tented top, 21 vias
v2: diameter 0.6, hole 0.3, Top Layer to Bottom Layer, tented both sides, 9 vias
v3: diameter 0.6, hole 0.3, Top Layer to Bottom Layer, 4 vias
v4: diameter 0.6, hole 0.3, Top Layer to Bottom Layer, tented top, 4 vias

## Nets (pads, with @x,y where several pads share a name; then routed paths per layer and width w, separated by ;. In a path a pad name is that pad's centre, name@x,y a point inside that pad or via, vN(x,y) a via of type N, cw(c..) or ccw(c..) an arc to the next point about the centre after c; other vN are vias at no path point)
+5V: C1.1 C2.1 C5.1 DD1.7 DD1.8 DD2.12 DD2.15 HL2.2 HL3.2 R1.2 R4.2 VD2.1 | length 12.9
  Top Layer w0.15: v1(74.4,74) 74.475,74.075 76.025,74.075 C1.1 ; C2.1@76.3,70.4 v1(77.4,70.4) ; v1@78.5,70.4 v1(78.55,70.4) 78.55,71.15 DD1.7 ; v1(79.5,69.4) DD1.8 ; R1.2@87.675,78.1 v1(89,78.1) ; R4.2@89.775,67.3 90.8,66.275 v1(90.8,66.1) ; HL2.2@91.85,80.5 91.9,80.45 v1(91.9,79.5) ; v1(93.2,80.5) HL3.2@94.275,80.5 ; v1(95.2,66) 95.225,65.975 96.625,65.975 DD2.15@96.65,65.95 ; v1(95.2,67.9) DD2.12@96.65,67.9
  other v1: 91.8,66.9 91.8,67.9 91.8,68.8 92.8,68.8 93.7,68.8 69.3,75.7 70.4,75.7 69.3,76.8 70.4,76.8 69.3,77.9 70.4,77.9
CN_5V_IN: L1.1 VD1.4 X1.1 | length 9.6
  Top Layer w0.15: X1.1 56.75,69.6 59.5,66.85 VD1.4 59.7,70.4 60.065,70.765 60.065,70.785 60.48,71.2 L1.1
GND: C1.2 C3.2 C4.1 C5.2 C6.2 C7.1 DD1.0 DD1.2 DD2.1 DD2.14 DD2.16 HL1.1 S1.1 VD1.1 VD3.2 VD4.2 X1.5 X1.TP1 X1.TP2 X2.5 X2.TP1 | length 2.7
  Top Layer w0.15: DD1.2 80,73.8 v2(81,72.8)
  other v2: 79.9,71.7 81,71.7 82.1,71.7 79.9,72.8 82.1,72.8 79.9,73.9 81,73.9 82.1,73.9
NetC2_2: C2.2 C3.1 DD1.5 DD1.6 | length 5.4
  Top Layer w0.15: C3.1@74.5,72.1 76.3,72.1 77.7,72.1 ; DD1.6 78,71.8 77.7,72.1 ; DD1.5 77.9,72.3 77.7,72.1
NetC4_2: C4.2 DD1.9 R4.1 S1.2 | length 23.9
  Top Layer w0.15: DD1.9 80,70.075 81.975,68.1 86.081,68.1 86.506,67.675 87.875,67.675 88.225,67.325 R4.1@88.225,67.3 ; S1.2@84.75,59.55 84.75,67.05 87.975,67.05 R4.1@88.225,67.3 ; C4.2@89.9,65 89.575,65.325 89.575,65.925 88.225,67.275 R4.1@88.225,67.3
NetC6_1: C6.1 DD2.3 | length 7.4
  Top Layer w0.15: DD2.3 103.225,66.6 102.3,65.675 102.3,65.2 104.4,63.1 C6.1 C6.1@106,62.7 ; C6.1@106.275,63.025 C6.1@106.275,63.1
NetC7_2: C7.2 DD2.7 | length 4.1
  Top Layer w0.15: DD2.7 104.325,69.2 104.825,69.7 104.825,70.525 106,71.7 C7.2
NetC8_1: C8.1 DD2.5 | length 6
  Top Layer w0.15: DD2.5 103.825,67.85 108.15,67.85 109,68.7 C8.1
NetC8_2: C8.2 DD2.6 | length 2.5
  Top Layer w0.15: DD2.6 105.45,68.55 C8.2
NetC9_1: C9.1 DD2.2 | length 2.7
  Top Layer w0.15: DD2.2 105.85,65.95 C9.1 C9.1@106,66.5
NetC9_2: C9.2 DD2.4 | length 6.4
  Top Layer w0.15: DD2.4 103.875,67.35 108.15,67.35 109,66.5 C9.2 C9.2@109,65.7
NetHL1_2: HL1.2 R1.1 | length 3.1
  Top Layer w0.15: R1.1@86.125,78.1 86.125,78.85 87.7,80.425 HL1.2@87.7,80.5
NetHL2_1: HL2.1 R2.1 | length 2.6
  Top Layer w0.15: HL2.1@90.2,80.5 90.2,78.125 R2.1@90.325,78
NetHL3_1: HL3.1 R3.1 | length 3.2
  Top Layer w0.15: R3.1@94.425,77.9 94.425,78.925 95.925,80.425 HL3.1@95.925,80.5
NetL1_2: L1.2 VD2.2 | length 6.7
  Top Layer w0.15: L1.2 61.98,71.915 63.05,72.985 63.05,76.075 63.575,76.6 VD2.2@64.175,76.6
NetR5_2: R5.2 X2.2 | length 3.8
  Top Layer w0.15: R5.2@116.4,64 116.46,64.06 X2.2
NetR6_2: R6.2 X2.3 | length 4.8
  Top Layer w0.15: R6.2@116.4,69.175 117.375,69.175 119.75,66.8 X2.3
RX: DD1.24 DD2.9 | length 18.9
  Top Layer w0.15: DD1.24 81.5,76 v4(81.9,76.4) ; v4(92.2,71.8) 94.125,71.8 96.075,69.85 DD2.9@96.65,69.85
  Bottom Layer w0.15: v4(81.9,76.4) 86.5,71.8 v4(92.2,71.8)
RX_LED: DD1.18 R3.2 | length 14.8
  Top Layer w0.15: DD1.18 90.875,72.8 95.6,77.525 95.625,77.525 95.975,77.875 R3.2@95.975,77.9
RX_RS232: DD2.8 R6.1 VD4.1 | length 21.4
  Top Layer w0.15: DD2.8@103.9,69.85 103.9,72.9 104.7,73.7 111.1,73.7 112.594,72.206 112.594,68.356 113.8,67.15 VD4.1 115.675,66.925 116.375,67.625 R6.1@116.4,67.625
TX: DD1.25 DD2.11 | length 20.6
  Top Layer w0.15: v4(80.7,76.4) 80.7,76.278 81,75.978 DD1.25 ; v4(92.2,70.8) 93.825,70.8 96.075,68.55 DD2.11@96.65,68.55
  Bottom Layer w0.15: v4(80.7,76.4) 86.3,70.8 v4(92.2,70.8)
TX_LED: DD1.19 R2.2 | length 10.5
  Top Layer w0.15: DD1.19 87.175,73.3 91.5,77.625 91.525,77.625 91.875,77.975 R2.2@91.875,78
TX_RS232: DD2.13 R5.1 VD3.1 | length 22.7
  Top Layer w0.15: DD2.13@96.65,67.25 98.75,67.25 104.6,61.4 111.5,61.4 112.075,61.975 113.675,61.975 113.8,62.1 VD3.1 113.925,62.45 R5.1@116.4,62.45
USB_D_N: DD1.4 VD1.3 X1.2 | length 35.1
  Top Layer w0.155: X1.2 55.968,68.928 56.334,68.928 56.359,68.903 56.765,68.903 58.653,67.015 58.653,65.263 58.743,65.172 59.478,65.172 VD1.3 58.743,64.95 58.653,64.859 58.653,62.747 v3(58.9,62.5) ; v3(72.4,72.6) 72.697,72.897 78.183,72.897 78.28,72.8 DD1.4
  Bottom Layer w0.155: v3(58.9,62.5) 58.9,62.566 58.653,62.813 58.653,63.006 68.544,72.897 72.087,72.897 72.384,72.6 v3(72.4,72.6)
USB_D_P: DD1.3 VD1.2 X1.3 | length 35.1
  Top Layer w0.155: X1.3 55.968,68.572 56.334,68.572 56.359,68.597 56.639,68.597 58.347,66.889 58.347,65.263 58.257,65.172 57.522,65.172 VD1.2 58.257,64.95 58.347,64.859 58.347,62.747 v3(58.1,62.5) ; v3(72.4,73.5) 72.697,73.203 78.183,73.203 78.28,73.3 DD1.3
  Bottom Layer w0.155: v3(58.1,62.5) 58.1,62.566 58.347,62.813 58.347,63.132 68.418,73.203 72.087,73.203 72.384,73.5 v3(72.4,73.5)
pads on no net: DD1.1 DD1.10 DD1.11 DD1.12 DD1.13 DD1.14 DD1.15 DD1.16 DD1.17 DD1.20 DD1.21 DD1.22 DD1.23 DD1.26 DD1.27 DD1.28 DD2.10 X1.4 X2. X2.1 X2.4 X2.6 X2.7 X2.8 X2.9

## Polygon pours and split planes (outlines as drawn)
GND on Top Layer "NONET_L03_P-001" (solid, pour order 50): 50,83.8 50,50 128,50 128,83.901
+5V on Top Layer "+5V_L01_P010" (solid, pour order 10): 65.9,74.5 65.9,78.8 70.9,78.8 70.9,74.5
+5V on Top Layer "+5V_L01_P036" (solid, remove dead copper, pour order 36): 91.3,66.5 91.3,69.2 94.7,69.2 94.7,66.5
+5V on Signal Layer 2 "+5V_L03_P054" (solid, pour order 54): 50.5,83.3 50.5,50.5 127.1,50.5 127.5,50.9 127.2,51.2 127.2,83.7
GND on Signal Layer 1 "GND_L02_P028" (solid, pour order 28): 50.7,83.2 50.7,50.9 50.6,50.8 50.7,50.7 127.1,50.7 127.1,83.3 127.2,83.4
GND on Bottom Layer "GND_L04_P052" (solid, pour order 52): 50.5,83.4 50.5,50.9 50.4,50.8 127.5,50.8 127.5,83.3 127.3,83.5

## Other copper
Top Layer:
  pour cut-out: 127.9,50
Signal Layer 2:
  text ".Comment" at 95.2,82.3 h1.2
  text ".Comment" at 90.2,81.5 h1.2

## Silkscreen, mask and mechanical layers (free items; w line width, h text height)
Top Overlay:
  text "PWR" at 86.125,78.85 h1.2
  text "RX" at 94.705,78.809 h1.2
  text "TX" at 90.6,78.8 h1.2
  text "USB-RS232" at 91.5,53.1 h4
  text ".designation" at 52.5,52.5 h2
Bottom Overlay:
  text ".pcb_dec_number" at 68.5,52.5 h2
Board:
  the board outline again, w0.1
Assembly Notes (Mech5):
  text "'.title'" at 50,47.5 h2
  text "'.project'_'.pcb_dec_number'['.Pcb_File_Name_No_Path']" at 50,45 h2